# Altium PCB f429ig.pcbdoc (part 1 of 3)
Units mil, origin at the board's own origin, x right, y up, seen from the top; angles counter-clockwise.
Board outline 8198.65 x 7801.59 mil, 2 copper layers (Top Layer, Bottom Layer); 96 components, 183 nets, 663 pads, 462 vias.
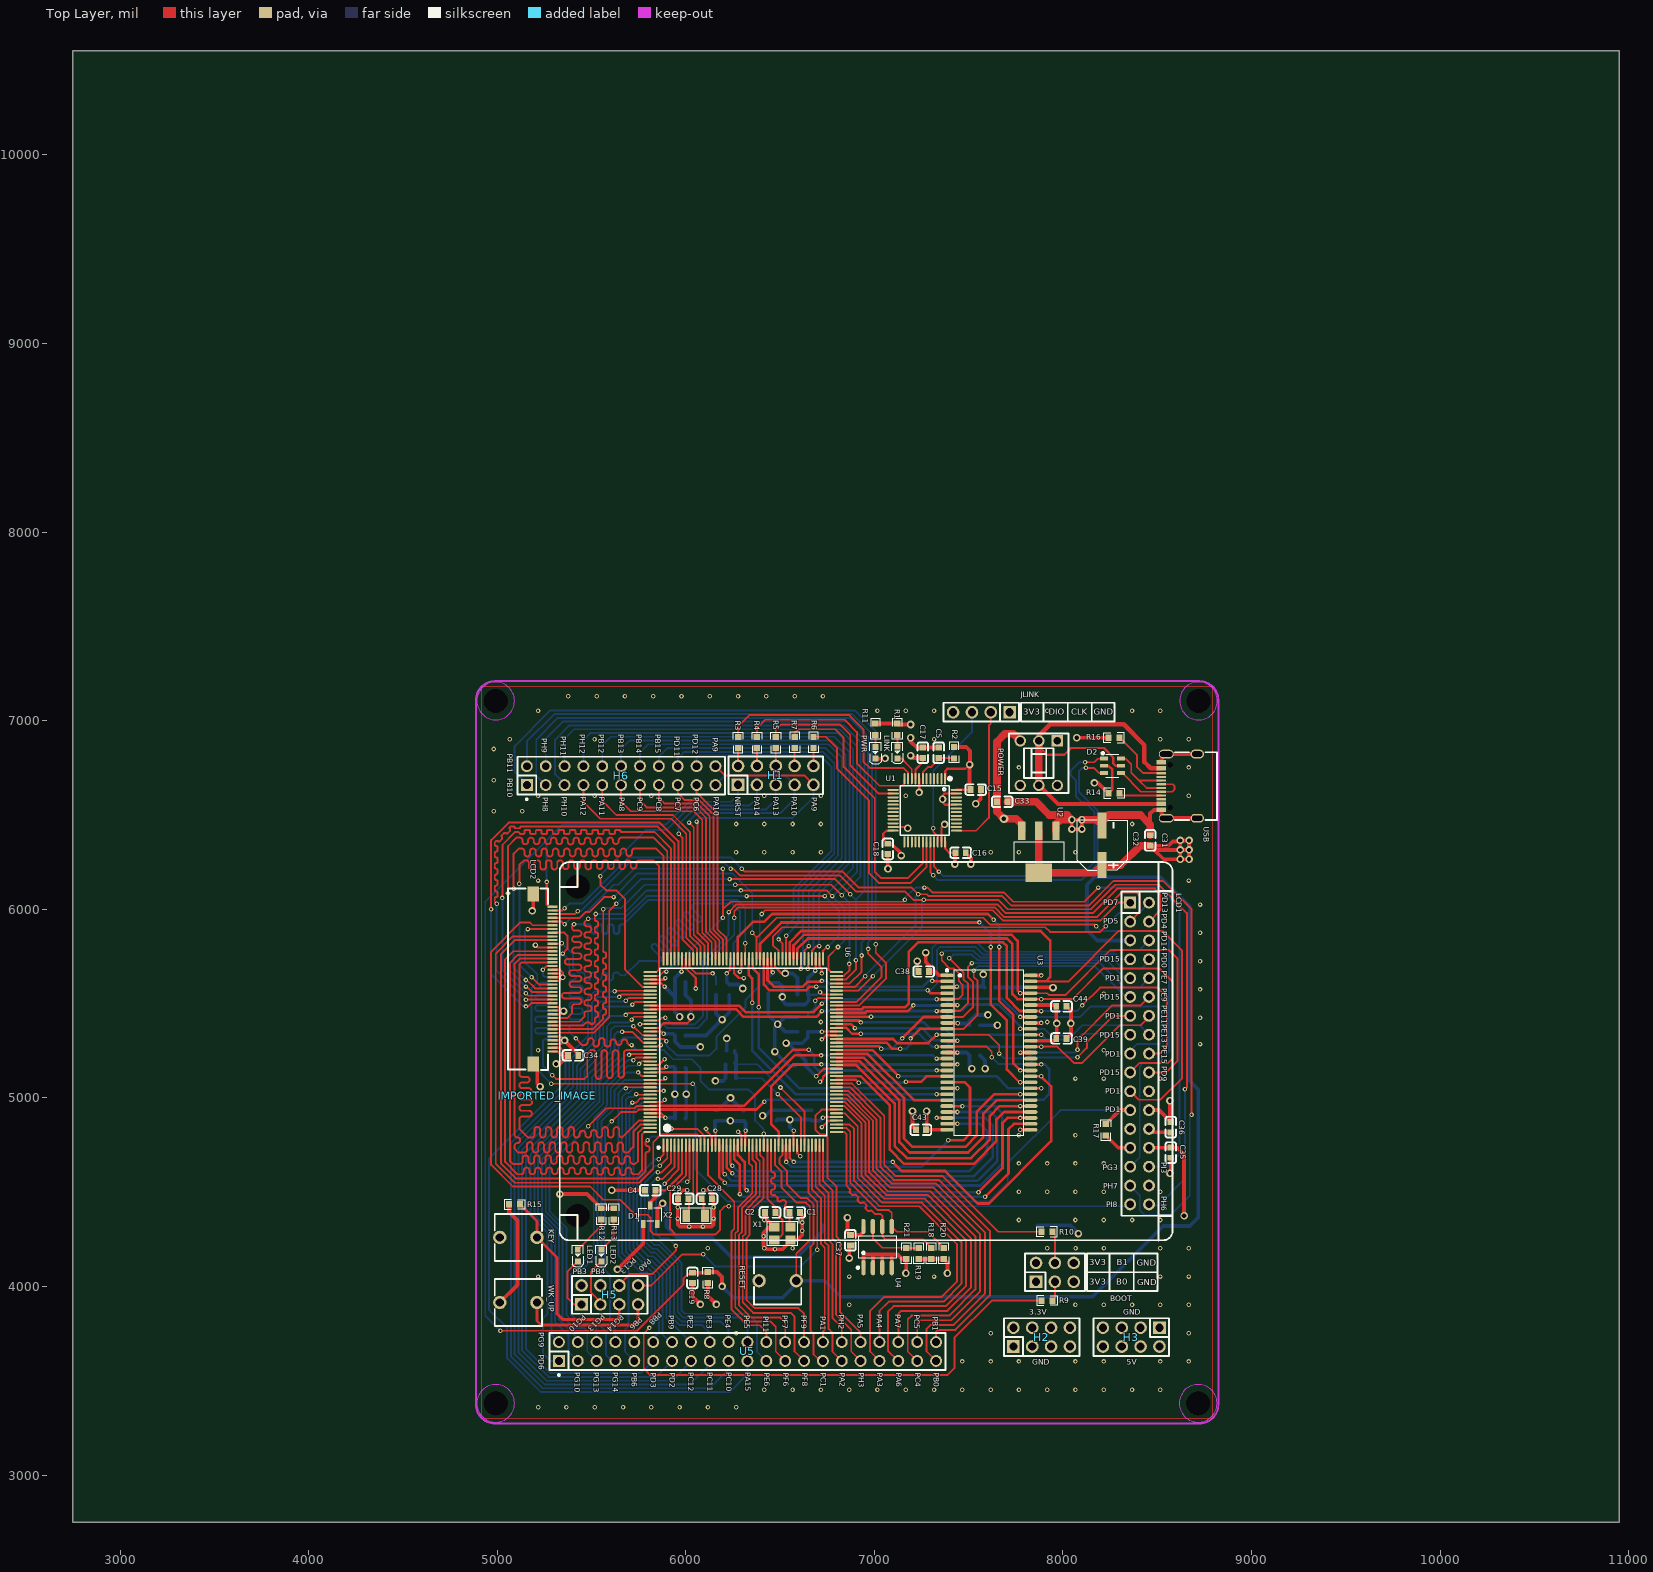
[diagram p0: Top Layer view]
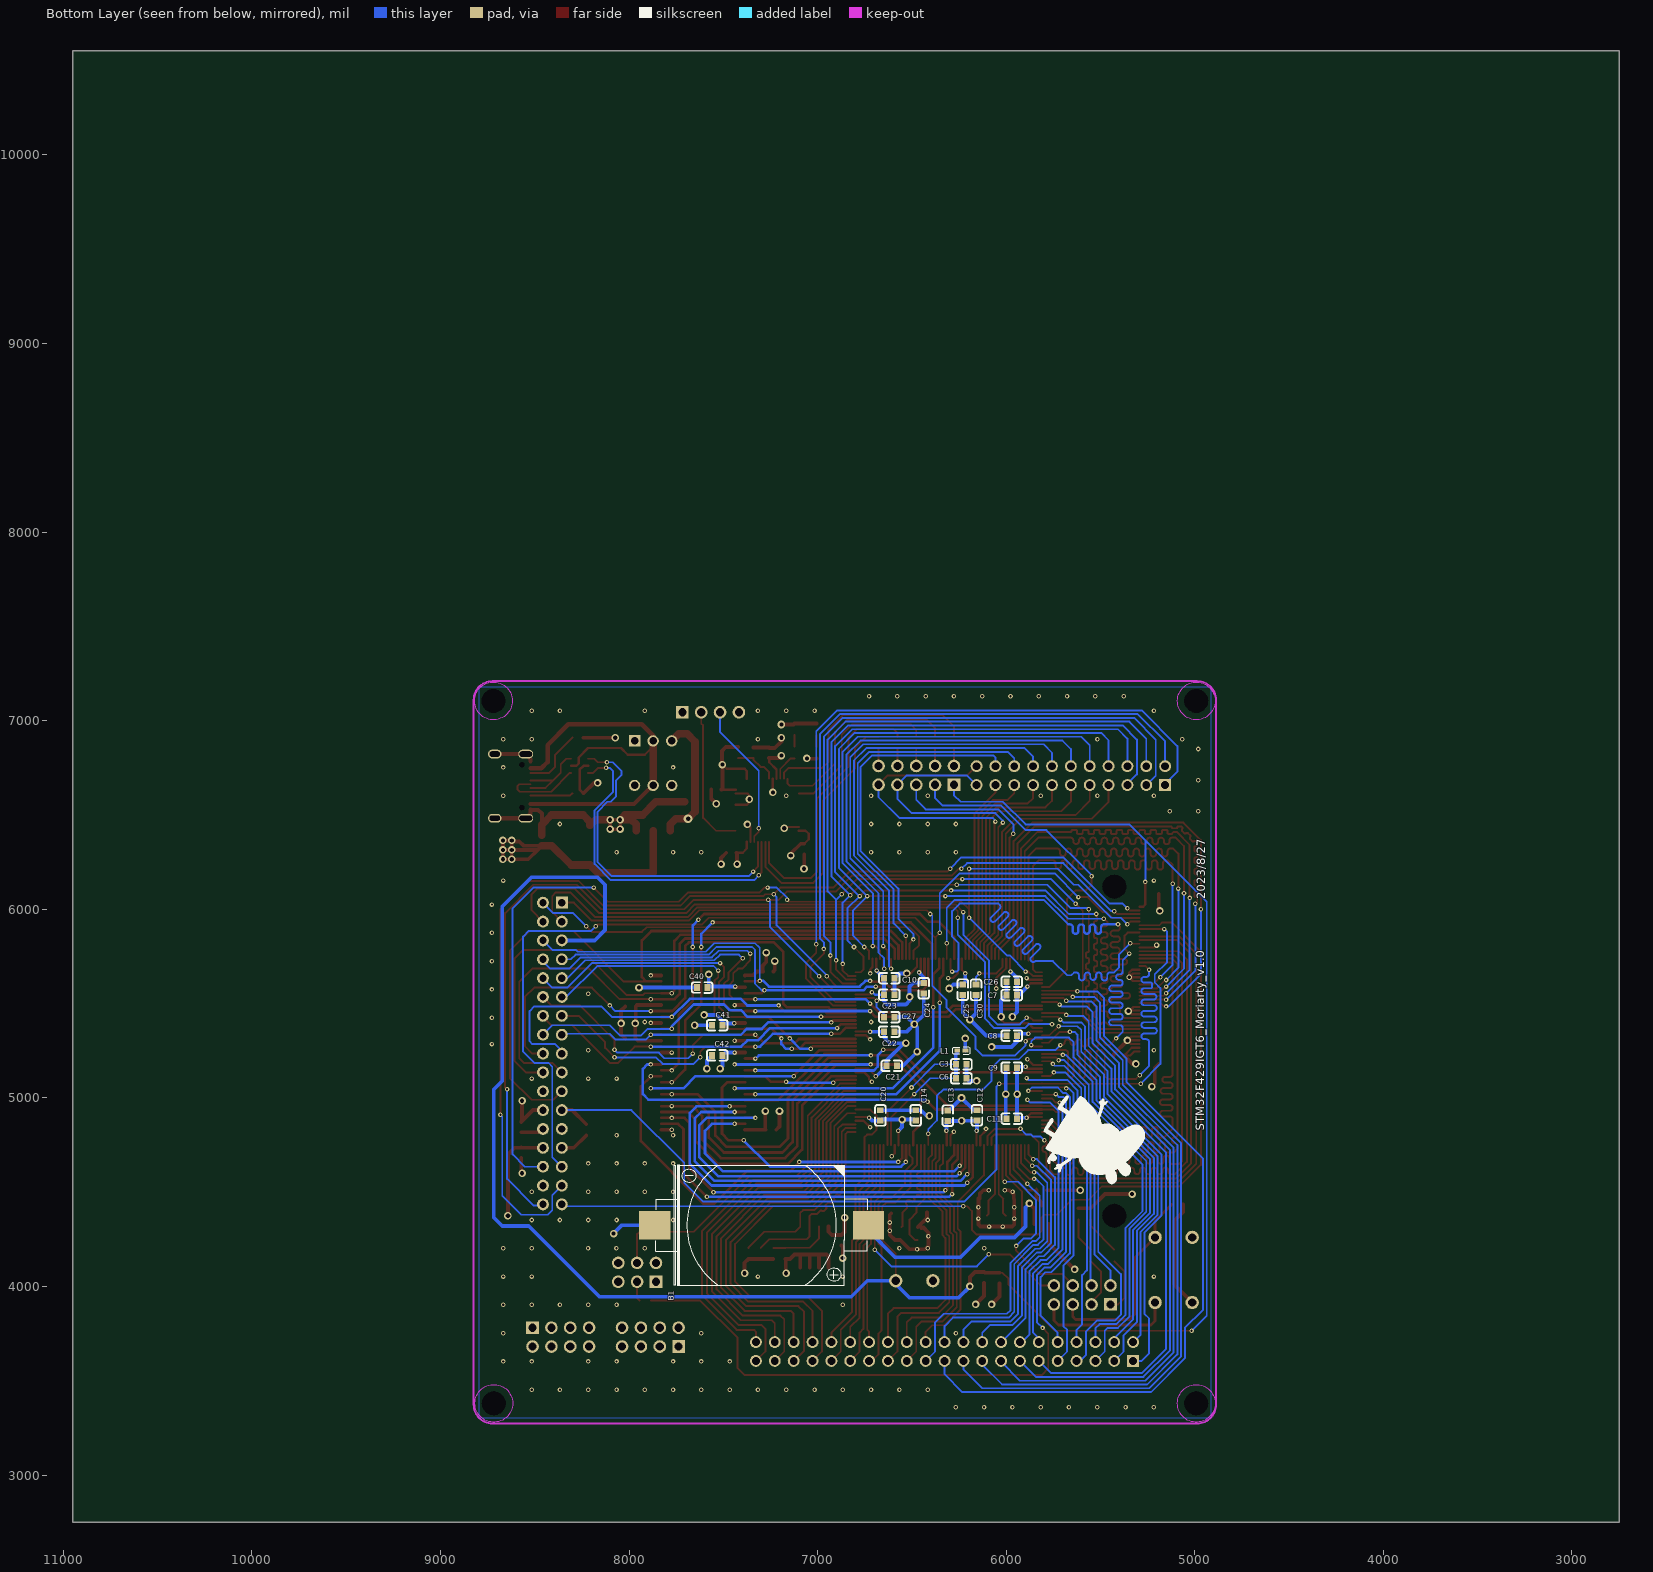
[diagram p1: Bottom Layer view, seen from below]

## Layer stack, top to bottom
Top Layer: signal copper (thickness not stored)
Dielectric: dielectric 12.6, FR-4, Dk 4.8
Bottom Layer: signal copper (thickness not stored)

## Board outline
10948.65,2750 2750,2750 2750,10551.59 10948.65,10551.59
cut-out: 8782.11,7105.13 ccw(c8719.11,7105.13) 8656.12,7105.13 ccw(c8719.11,7105.13)
cut-out: 5489.15,6120 ccw(c5426.16,6120) 5363.17,6120 ccw(c5426.16,6120)
cut-out: 5489.15,4374.84 ccw(c5426.16,4374.84) 5363.17,4374.84 ccw(c5426.16,4374.84)
cut-out: 5055.1,7105.01 ccw(c4992.11,7105.01) 4929.12,7105.01 ccw(c4992.11,7105.01)
cut-out: 5055.1,3380.13 ccw(c4992.11,3380.13) 4929.11,3380.13 ccw(c4992.11,3380.13)
cut-out: 8780.1,3380.13 ccw(c8717.11,3380.13) 8654.11,3380.13 ccw(c8717.11,3380.13)

## Components (designator, comment, footprint, x,y, rotation, side; value= is the part's Value field where it differs from the comment)
B1 "CR2032-BS-6-1" BAT-TH_CR2032-BS-6-1 7296.94,4325 r180 bottom
BOOT "PZ254V-12-6P" HDR-TH_6P-P2.54-V-M-R2-C3-S2.54 7956.93,4075 r0 top
C1 "0603CG220J500NT" C0603 6576.93,4392.51 r180 top
C2 "0603CG220J500NT" C0603 6446.93,4392.3 r0 top
C3 "CAP_0603" C0603 6237.94,5178.21 r0 bottom
C4 "CC0603KRX7R9BB104" C0603 5811.93,4510 r0 top
C5 "CC0603KRX7R9BB104" C0603 7340.6,6830 r270 top
C6 "CAP_0603" C0603 6237.94,5103.76 r0 bottom
C7 "CC0603KRX7R9BB104" C0603 5969.97,5545 r180 bottom
C8 "CC0603KRX7R9BB104" c0603 5969.97,5330 r180 bottom
C9 "CC0603KRX7R9BB104" C0603 5969.97,5160 r180 bottom
C10 "CC0603KRX7R9BB104" C0603 6619.97,5635 r0 bottom
C11 "CC0603KRX7R9BB104" C0603 5969.97,4890 r180 bottom
C12 "CC0603KRX7R9BB104" C0603 6154.97,4906.75 r270 bottom
C13 "CC0603KRX7R9BB104" C0603 6309.23,4905.57 r270 bottom
C14 "CC0603KRX7R9BB104" C0603 6479.97,4906.75 r270 bottom
C15 "CC0603KRX7R9BB104" C0603 7536.93,6635 r180 top
C16 "CC0603KRX7R9BB104" C0603 7456.93,6300 r180 top
C17 "CC0603KRX7R9BB104" C0603 7256.93,6830 r270 top
C18 "CC0603KRX7R9BB104" C0603 7071.15,6320 r90 top
C19 "CC0603KRX7R9BB104" C0603 6035.2,4045 r90 top
C20 "CC0603KRX7R9BB104" C0603 6666.93,4906.75 r270 bottom
C21 "CC0603KRX7R9BB104" C0603 6606.93,5169.88 r0 bottom
C22 "CC0603KRX7R9BB104" C0603 6619.97,5351.1 r0 bottom
C23 "CC0603KRX7R9BB104" C0603 6619.97,5547.01 r0 bottom
C24 "CC0603KRX7R9BB104" C0603 6436.93,5581.59 r90 bottom
C25 "CC0603KRX7R9BB104" C0603 6229.97,5574.17 r90 bottom
C26 "CC0603KRX7R9BB104" C0603 5969.97,5615 r180 bottom
C27 "CL10A225KQ8NNNC" C0603 6619.97,5428.15 r0 bottom
C28 "CC0603JRNPO9BN100" C0603 6111.93,4465 r180 top
C29 "CC0603JRNPO9BN100" C0603 5986.93,4464.79 r0 top
C30 "CL10A225KQ8NNNC" C0603 6159.75,5573.15 r90 bottom
C31 "CC0603KRX7R9BB104" C0603 8461.93,6365 r270 top
C32 "RVT1A221M0605_C72494" CAP-SMD_BD6.3-L6.6-W6.6-FD 8206.93,6340 r90 top
C33 "CC0603KRX7R9BB104" C0603 7677.64,6570 r180 top
C34 "CC0603KRX7R9BB104" C0603 5401.93,5224.92 r0 top
C35 "CC0603KRX7R9BB104" C0603 8571.93,4710 r90 top
C36 "CC0603KRX7R9BB104" C0603 8571.93,4845 r90 top
C37 "CC0603KRX7R9BB104" C0603 6872.77,4245 r90 top
C38 "CC0603KRX7R9BB104" C0603 7261.93,5670 r0 top
C39 "CC0603KRX7R9BB104" C0603 7991.93,5315 r180 top
C40 "CC0603KRX7R9BB104" C0603 7611.93,5585 r180 bottom
C41 "CC0603KRX7R9BB104" C0603 7531.93,5385 r180 bottom
C42 "CC0603KRX7R9BB104" C0603 7531.93,5225 r180 bottom
C43 "CC0603KRX7R9BB104" C0603 7246.93,4830.55 r0 top
C44 "CC0603KRX7R9BB104" C0603 7991.93,5485 r180 top
D1 "BAT54C_C2135" SOT-23-3_L2.9-W1.6-P1.90-LS2.8-BR 5811.63,4380 r270 top
D2 "USBLC6-2SC6_C2827654" SOT-23-6_L2.9-W1.6-P0.95-LS2.8-BL 8261.93,6761.03 r270 top
H1 "PZ254V-12-10P" HDR-TH_10P-P2.54-V-M-R2-C5-S2.54 6476.93,6710 r0 top
H2 "PZ254V-12-8P" HDR-TH_8P-P2.54-V-M-R2-C4-S2.54 7886.93,3731.28 r0 top
H3 "PZ254V-12-8P" HDR-TH_8P-P2.54-V-M-R2-C4-S2.54 8361.62,3731.28 r180 top
H5 "PZ254V-12-8P" HDR-TH_8P-P2.54-V-M-R2-C4-S2.54 5596.93,3955 r0 top
H6 "X6521WV-2x11H-C60D30" HDR-TH_22P-2.54-V-M-R2-C11-S2.54 5656.93,6709 r0 top
IMPORTED_IMAGE "IMPORTED_IMAGE" IMPORTED_IMAGE 5264.33,5010.71 r0 top
JLINK "PZ254V-11-04P" HDR-TH_4P-P2.54-V-M 7567.21,7045 r180 top
KEY "CMI626001D10" SW-TH_2P-L6.2-W6.2-P5.0 5111.93,4260 r180 top
L1 "GZ1005D121TF" L0402 6237.63,5250 r180 bottom
LCD1 "={Manufacturer Part}" HDR-TH_34P-P2.54-V-F-R2-C17-S2.54 8406.16,5235 r270 top
LCD2 "={Manufacturer Part}" FPC-SMD_P0.50-40P_FGS-XJ-H2.0 5241.93,5630 r90 top
LED1 "NCD0603W1" LED0603-RD 5426.93,4164.29 r90 top
LED2 "NCD0603W1" LED0603-RD 5551.93,4164.29 r90 top
LINK "NCD0603W1" LED0603-RD 7121.93,6831.87 r90 top
POWER "XKB8080-Z" SW-TH_6P-L8.0-W8.0-P2.50 7871.93,6775 r180 top
PWR "NCD0603W1" LED0603-RD 7005.67,6830.14 r90 top
R1 "0603WAF1001T5E" R0603 7121.72,6955 r90 top
R2 "0603WAF1002T5E" R0603 7421.93,6830.31 r90 top
R3 "0603WAF1000T5E" R0603 6276.93,6885 r270 top
R4 "0603WAF1000T5E" R0603 6376.93,6885 r270 top
R5 "0603WAF1000T5E" R0603 6476.93,6885 r270 top
R6 "0603WAF1000T5E" R0603 6676.93,6885 r90 top
R7 "0603WAF1000T5E" R0603 6576.93,6885 r90 top
R8 "0603WAF1002T5E" R0603 6116.93,4047.19 r270 top
R9 "0603WAF1002T5E" R0603 7914.56,3925 r180 top
R10 "0603WAF1002T5E" R0603 7914.56,4290 r0 top
R11 "0603WAF1001T5E" R0603 7005.45,6955 r90 top
R12 "0603WAF4700T5E" R0603 5551.93,4385 r270 top
R13 "0603WAF4700T5E" R0603 5616.93,4385 r270 top
R14 "0603WAF4701T5E" R0603 8270.74,6615 r180 top
R15 "0603WAF4701T5E" R0603 5091.93,4435 r180 top
R16 "0603WAF4701T5E" R0603 8270.74,6910 r0 top
R17 "0603WAF4701T5E" R0603 8226.93,4830.66 r270 top
R18 "0603WAF4701T5E" R0603 7301.1,4175 r90 top
R19 "0603WAF4701T5E" R0603 7235.27,4175 r90 top
R20 "0603WAF4701T5E" R0603 7366.93,4175 r90 top
R21 "0603WAF1000T5E" R0603 7169.44,4175 r90 top
RESET "CMI626001D10" SW-TH_2P-L6.2-W6.2-P5.0 6486.93,4030 r180 top
U1 "STM32F072C8T6" LQFP-48_L7.0-W7.0-P0.50-LS9.0-BL 7266.93,6525 r180 top
U2 "AMS1117-3.3_C347222" SOT-223-4_L6.5-W3.5-P2.30-LS7.0-BR 7871.93,6305 r90 top
U3 "W9825G6KH-6" TSOP-54_L22.2-W10.2-P0.80-LS11.8-BL 7606.93,5240 r270 top
U4 "AT24C256C-SSHL-T" SOIC-8_L4.9-W3.9-P1.27-LS6.0-BL 7016.93,4208.58 r0 top
U5 "X6521WV-2x21H-C60D30" HDR-TH_42P-P2.54-V-M-R2-C21-S2.54 6326.93,3655 r0 top
U6 "STM32F429IGT6" LQFP-176_L24.0-W24.0-P0.50-LS26.0-BL 6304.97,5243.15 r0 top
USB "KH-TYPE-C-16P" USB-C-SMD_KH-TYPE-C-16P 8616.93,6652.98 r90 top
WK_UP "CMI626001D10" SW-TH_2P-L6.2-W6.2-P5.0 5111.93,3915 r0 top
X1 "X322525MOB4SI" OSC-SMD_4P-L3.2-W2.5-BL 6511.93,4280 r180 top
X2 "Q13FC1350004900" CRYSTAL-SMD_L3.2-W1.5-1 6051.93,4375 r180 top

## Footprints (in the part's own frame and the unit in brackets; to place one, negate y for a bottom-side part, rotate by r counter-clockwise, add the part's x,y. Pads: shape width x height; smd on the part's side, far side on the other; paste and mask are expansions set on the pad)
BAT-TH_CR2032-BS-6-1 [mm]
  rect 4.2x3.8 smd mask+0.051: 1(14.385,0) 2(-14.385,0)
  silkscreen extent -14.25,-8.15 14.25,8.15
C0603 [mm]
  rect 0.8x0.9 smd mask+0.051: 1(-0.7,0) 2(0.7,0)
  silkscreen extent -1.41,-0.71 1.39,0.72
c0603 [mm]
  rect 0.8x0.9 smd mask+0.051: 1(-0.7,0) 2(0.7,0)
  silkscreen extent -1.41,-0.71 1.39,0.72
CAP-SMD_BD6.3-L6.6-W6.6-FD [mm]
  rect 3.5x1.2 smd mask+0.051: 1(-2.67,0) 2(2.67,0)
  silkscreen extent -3.38,-3.38 3.38,3.38
CRYSTAL-SMD_L3.2-W1.5-1 [mm]
  rect 1.05x1.7 smd mask+0.051: 1(-1.275,0) 2(1.275,0)
  silkscreen extent -2.03,-1.08 2.03,1.08
FPC-SMD_P0.50-40P_FGS-XJ-H2.0 [mm]
  rect 0.3x1.3 smd paste+0 mask+0.05: 1(-9.75,-1.3) 2(-9.25,-1.3) 3(-8.75,-1.3) 4(-8.25,-1.3) 5(-7.75,-1.3) 6(-7.25,-1.3) 7(-6.75,-1.3) 8(-6.25,-1.3) 9(-5.75,-1.3) 10(-5.25,-1.3) 11(-4.75,-1.3) 12(-4.25,-1.3) 13(-3.75,-1.3) 14(-3.25,-1.3) 15(-2.75,-1.3) 16(-2.25,-1.3) 17(-1.75,-1.3) 18(-1.25,-1.3) 19(-0.75,-1.3) 20(-0.25,-1.3) 21(0.25,-1.3) 22(0.75,-1.3) 23(1.25,-1.3) 24(1.75,-1.3) 25(2.25,-1.3) 26(2.75,-1.3) 27(3.25,-1.3) 28(3.75,-1.3) 29(4.25,-1.3) 30(4.75,-1.3) 31(5.25,-1.3) 32(5.75,-1.3) 33(6.25,-1.3) 34(6.75,-1.3) 35(7.25,-1.3) 36(7.75,-1.3) 37(8.25,-1.3) 38(8.75,-1.3) 39(9.25,-1.3) 40(9.75,-1.3)
  rect 2x1.6 smd mask+0.051: 41(11.45,1.3) 42(-11.45,1.3)
  silkscreen extent -12.25,-0.7 12.2,4.7
HDR-TH_4P-P2.54-V-M [mm]
  rect 1.7x1.7 hole 1.1 mask+0.051: 1(-3.81,0)
  round 1.7 hole 1.1 mask+0.051: 2(-1.27,0) 3(1.27,0) 4(3.81,0)
  silkscreen extent -5.08,-1.27 5.08,1.27
HDR-TH_6P-P2.54-V-M-R2-C3-S2.54 [mm]
  rect 1.7x1.7 hole 1.1 mask+0.051: 1(-2.54,-1.27)
  round 1.7 hole 1.1 mask+0.051: 2(-2.54,1.27) 3(0,-1.27) 4(0,1.27) 5(2.54,-1.27) 6(2.54,1.27)
  silkscreen extent -4.04,-2.54 4.04,2.54
HDR-TH_8P-P2.54-V-M-R2-C4-S2.54 [mm]
  rect 1.7x1.7 hole 1.1 mask+0.051: 1(-3.81,-1.27)
  round 1.7 hole 1.1 mask+0.051: 2(-3.81,1.27) 3(-1.27,-1.27) 4(-1.27,1.27) 5(1.27,-1.27) 6(1.27,1.27) 7(3.81,-1.27) 8(3.81,1.27)
  silkscreen extent -5.08,-2.54 5.08,2.54
HDR-TH_10P-P2.54-V-M-R2-C5-S2.54 [mm]
  rect 1.7x1.7 hole 1.1 mask+0.051: 1(-5.08,-1.27)
  round 1.7 hole 1.1 mask+0.051: 2(-5.08,1.27) 3(-2.54,-1.27) 4(-2.54,1.27) 5(0,-1.27) 6(0,1.27) 7(2.54,-1.27) 8(2.54,1.27) 9(5.08,-1.27) 10(5.08,1.27)
  silkscreen extent -6.35,-2.54 6.35,2.54
HDR-TH_22P-2.54-V-M-R2-C11-S2.54 [mm]
  rect 1.6x1.6 hole 1.05 mask+0.051: 1(-12.7,-1.27)
  round 1.6 hole 1.05 mask+0.051: 2(-12.7,1.27) 3(-10.16,-1.27) 4(-10.16,1.27) 5(-7.62,-1.27) 6(-7.62,1.27) 7(-5.08,-1.27) 8(-5.08,1.27) 9(-2.54,-1.27) 10(-2.54,1.27) 11(0,-1.27) 12(0,1.27) 13(2.54,-1.27) 14(2.54,1.27) 15(5.08,-1.27) 16(5.08,1.27) 17(7.62,-1.27) 18(7.62,1.27) 19(10.16,-1.27) 20(10.16,1.27) 21(12.7,-1.27) 22(12.7,1.27)
  silkscreen extent -13.97,-3.3 13.97,2.54
HDR-TH_34P-P2.54-V-F-R2-C17-S2.54 [mm]
  rect 1.6x1.6 hole 1 mask+0.051: 1(-20.32,-1.27)
  round 1.6 hole 1 mask+0.051: 2(-20.32,1.27) 3(-17.78,-1.27) 4(-17.78,1.27) 5(-15.24,-1.27) 6(-15.24,1.27) 7(-12.7,-1.27) 8(-12.7,1.27) 9(-10.16,-1.27) 10(-10.16,1.27) 11(-7.62,-1.27) 12(-7.62,1.27) 13(-5.08,-1.27) 14(-5.08,1.27) 15(-2.54,-1.27) 16(-2.54,1.27) 17(0,-1.27) 18(0,1.27) 19(2.54,-1.27) 20(2.54,1.27) 21(5.08,-1.27) 22(5.08,1.27) 23(7.62,-1.27) 24(7.62,1.27) 25(10.16,-1.27) 26(10.16,1.27) 27(12.7,-1.27) 28(12.7,1.27) 29(15.24,-1.27) 30(15.24,1.27) 31(17.78,-1.27) 32(17.78,1.27) 33(20.32,-1.27) 34(20.32,1.27)
  silkscreen extent -21.84,-2.41 21.84,2.54
HDR-TH_42P-P2.54-V-M-R2-C21-S2.54 [mm]
  rect 1.6x1.6 hole 1.05 mask+0.051: 1(-25.4,-1.27)
  round 1.6 hole 1.05 mask+0.051: 2(-25.4,1.27) 3(-22.86,-1.27) 4(-22.86,1.27) 5(-20.32,-1.27) 6(-20.32,1.27) 7(-17.78,-1.27) 8(-17.78,1.27) 9(-15.24,-1.27) 10(-15.24,1.27) 11(-12.7,-1.27) 12(-12.7,1.27) 13(-10.16,-1.27) 14(-10.16,1.27) 15(-7.62,-1.27) 16(-7.62,1.27) 17(-5.08,-1.27) 18(-5.08,1.27) 19(-2.54,-1.27) 20(-2.54,1.27) 21(0,-1.27) 22(0,1.27) 23(2.54,-1.27) 24(2.54,1.27) 25(5.08,-1.27) 26(5.08,1.27) 27(7.62,-1.27) 28(7.62,1.27) 29(10.16,-1.27) 30(10.16,1.27) 31(12.7,-1.27) 32(12.7,1.27) 33(15.24,-1.27) 34(15.24,1.27) 35(17.78,-1.27) 36(17.78,1.27) 37(20.32,-1.27) 38(20.32,1.27) 39(22.86,-1.27) 40(22.86,1.27) 41(25.4,-1.27) 42(25.4,1.27)
  silkscreen extent -26.67,-3.3 26.67,2.5
IMPORTED_IMAGE [mil]
L0402 [mm]
  rect 0.79x0.54 smd paste-100 mask+0.051: 1(-0.545,0) 2(0.545,0)
  silkscreen extent -1.17,-0.5 1.17,0.5
LED0603-RD [mm]
  rect 0.8x0.8 smd mask+0.051: 1(-0.799,-0.003) 2(0.799,0.003)
  silkscreen extent -1.49,-0.75 1.39,0.76
LQFP-48_L7.0-W7.0-P0.50-LS9.0-BL [mm]
  oval 0.27x1.5 smd paste+0 mask+0.05: 1(-2.75,-4.25) 2(-2.25,-4.25) 3(-1.75,-4.25) 4(-1.25,-4.25) 5(-0.75,-4.25) 6(-0.25,-4.25) 7(0.25,-4.25) 8(0.75,-4.25) 9(1.25,-4.25) 10(1.75,-4.25) 11(2.25,-4.25) 12(2.75,-4.25) 25(2.75,4.25) 26(2.25,4.25) 27(1.75,4.25) 28(1.25,4.25) 29(0.75,4.25) 30(0.25,4.25) 31(-0.25,4.25) 32(-0.75,4.25) 33(-1.25,4.25) 34(-1.75,4.25) 35(-2.25,4.25) 36(-2.75,4.25)
  oval 1.5x0.27 smd paste+0 mask+0.05: 13(4.25,-2.75) 14(4.25,-2.25) 15(4.25,-1.75) 16(4.25,-1.25) 17(4.25,-0.75) 18(4.25,-0.25) 19(4.25,0.25) 20(4.25,0.75) 21(4.25,1.25) 22(4.25,1.75) 23(4.25,2.25) 24(4.25,2.75) 37(-4.25,2.75) 38(-4.25,2.25) 39(-4.25,1.75) 40(-4.25,1.25) 41(-4.25,0.75) 42(-4.25,0.25) 43(-4.25,-0.25) 44(-4.25,-0.75) 45(-4.25,-1.25) 46(-4.25,-1.75) 47(-4.25,-2.25) 48(-4.25,-2.75)
  silkscreen extent -3.59,-4.46 3.3,3.34
LQFP-176_L24.0-W24.0-P0.50-LS26.0-BL [mm]
  oval 0.28x1.8 smd mask+0.051: 1(-10.75,-12.55) 2(-10.25,-12.55) 3(-9.75,-12.55) 4(-9.25,-12.55) 5(-8.75,-12.55) 6(-8.25,-12.55) 7(-7.75,-12.55) 8(-7.25,-12.55) 9(-6.75,-12.55) 10(-6.25,-12.55) 11(-5.75,-12.55) 12(-5.25,-12.55) 13(-4.75,-12.55) 14(-4.25,-12.55) 15(-3.75,-12.55) 16(-3.25,-12.55) 17(-2.75,-12.55) 18(-2.25,-12.55) 19(-1.75,-12.55) 20(-1.25,-12.55) 21(-0.75,-12.55) 22(-0.25,-12.55) 23(0.25,-12.55) 24(0.75,-12.55) 25(1.25,-12.55) 26(1.75,-12.55) 27(2.25,-12.55) 28(2.75,-12.55) 29(3.25,-12.55) 30(3.75,-12.55) 31(4.25,-12.55) 32(4.75,-12.55) 33(5.25,-12.55) 34(5.75,-12.55) 35(6.25,-12.55) 36(6.75,-12.55) 37(7.25,-12.55) 38(7.75,-12.55) 39(8.25,-12.55) 40(8.75,-12.55) 41(9.25,-12.55) 42(9.75,-12.55) 43(10.25,-12.55) 44(10.75,-12.55) 89(10.75,12.55) 90(10.25,12.55) 91(9.75,12.55) 92(9.25,12.55) 93(8.75,12.55) 94(8.25,12.55) 95(7.75,12.55) 96(7.25,12.55) 97(6.75,12.55) 98(6.25,12.55) 99(5.75,12.55) 100(5.25,12.55) 101(4.75,12.55) 102(4.25,12.55) 103(3.75,12.55) 104(3.25,12.55) 105(2.75,12.55) 106(2.25,12.55) 107(1.75,12.55) 108(1.25,12.55) 109(0.75,12.55) 110(0.25,12.55) 111(-0.25,12.55) 112(-0.75,12.55) 113(-1.25,12.55) 114(-1.75,12.55) 115(-2.25,12.55) 116(-2.75,12.55) 117(-3.25,12.55) 118(-3.75,12.55) 119(-4.25,12.55) 120(-4.75,12.55) 121(-5.25,12.55) 122(-5.75,12.55) 123(-6.25,12.55) 124(-6.75,12.55) 125(-7.25,12.55) 126(-7.75,12.55) 127(-8.25,12.55) 128(-8.75,12.55) 129(-9.25,12.55) 130(-9.75,12.55) 131(-10.25,12.55) 132(-10.75,12.55)
  oval 1.8x0.28 smd mask+0.051: 45(12.55,-10.75) 46(12.55,-10.25) 47(12.55,-9.75) 48(12.55,-9.25) 49(12.55,-8.75) 50(12.55,-8.25) 51(12.55,-7.75) 52(12.55,-7.25) 53(12.55,-6.75) 54(12.55,-6.25) 55(12.55,-5.75) 56(12.55,-5.25) 57(12.55,-4.75) 58(12.55,-4.25) 59(12.55,-3.75) 60(12.55,-3.25) 61(12.55,-2.75) 62(12.55,-2.25) 63(12.55,-1.75) 64(12.55,-1.25) 65(12.55,-0.75) 66(12.55,-0.25) 67(12.55,0.25) 68(12.55,0.75) 69(12.55,1.25) 70(12.55,1.75) 71(12.55,2.25) 72(12.55,2.75) 73(12.55,3.25) 74(12.55,3.75) 75(12.55,4.25) 76(12.55,4.75) 77(12.55,5.25) 78(12.55,5.75) 79(12.55,6.25) 80(12.55,6.75) 81(12.55,7.25) 82(12.55,7.75) 83(12.55,8.25) 84(12.55,8.75) 85(12.55,9.25) 86(12.55,9.75) 87(12.55,10.25) 88(12.55,10.75) 133(-12.55,10.75) 134(-12.55,10.25) 135(-12.55,9.75) 136(-12.55,9.25) 137(-12.55,8.75) 138(-12.55,8.25) 139(-12.55,7.75) 140(-12.55,7.25) 141(-12.55,6.75) 142(-12.55,6.25) 143(-12.55,5.75) 144(-12.55,5.25) 145(-12.55,4.75) 146(-12.55,4.25) 147(-12.55,3.75) 148(-12.55,3.25) 149(-12.55,2.75) 150(-12.55,2.25) 151(-12.55,1.75) 152(-12.55,1.25) 153(-12.55,0.75) 154(-12.55,0.25) 155(-12.55,-0.25) 156(-12.55,-0.75) 157(-12.55,-1.25) 158(-12.55,-1.75) 159(-12.55,-2.25) 160(-12.55,-2.75) 161(-12.55,-3.25) 162(-12.55,-3.75) 163(-12.55,-4.25) 164(-12.55,-4.75) 165(-12.55,-5.25) 166(-12.55,-5.75) 167(-12.55,-6.25) 168(-12.55,-6.75) 169(-12.55,-7.25) 170(-12.55,-7.75) 171(-12.55,-8.25) 172(-12.55,-8.75) 173(-12.55,-9.25) 174(-12.55,-9.75) 175(-12.55,-10.25) 176(-12.55,-10.75)
  silkscreen extent -11.57,-13.03 11.25,11.25
OSC-SMD_4P-L3.2-W2.5-BL [mm]
  rect 1.4x1.2 smd mask+0.051: 1(-1.1,-0.875) 2(1.1,-0.875) 3(1.1,0.875) 4(-1.1,0.875)
  silkscreen extent -2.29,-1.9 2.03,1.65
R0603 [mil]
  rect 31.75x34.02 smd paste-3937.01 mask+2: 1(-29.66,0) 2(29.66,0)
  silkscreen extent -55,-26 55,26
SOIC-8_L4.9-W3.9-P1.27-LS6.0-BL [mm]
  oval 0.588x2.045 smd mask+0.051: 1(-1.905,-2.772) 2(-0.635,-2.772) 3(0.635,-2.772) 4(1.905,-2.772) 5(1.905,2.772) 6(0.635,2.772) 7(-0.635,2.772) 8(-1.905,2.772)
  silkscreen extent -2.8,-2.92 2.53,1.52
SOT-23-3_L2.9-W1.6-P1.90-LS2.8-BR [mm]
  rect 1.07x0.6 smd mask+0.051: 1(1.235,-0.95) 2(1.235,0.95) 3(-1.235,0)
  silkscreen extent -0.88,-1.54 0.88,1.54
SOT-23-6_L2.9-W1.6-P0.95-LS2.8-BL [mil]
  rect 20.95x42.2 smd mask+2: 1(-37.4,-45.24) 2(0,-45.24) 3(37.4,-45.24) 4(37.4,45.24) 5(0,45.24) 6(-37.4,45.24)
  silkscreen extent -72,-57 61,35
SOT-223-4_L6.5-W3.5-P2.30-LS7.0-BR [mm]
  rect 2.47x0.98 smd mask+0.051: 1(2.835,-2.3) 2(2.835,0) 3(2.835,2.3)
  rect 2.47x3.6 smd mask+0.051: 4(-2.835,0)
  silkscreen extent -1.37,-3.33 1.37,3.33
SW-TH_2P-L6.2-W6.2-P5.0 [mm]
  round 1.8 hole 1.1 paste+0 mask+0.05: 1(-2.5,0) 2(2.5,0)
  silkscreen extent -3.18,-3.18 3.17,3.18
SW-TH_6P-L8.0-W8.0-P2.50 [mm]
  rect 1.524x1.524 hole 1 mask+0.051: 1(-2.5,-3)
  round 1.524 hole 1 mask+0.051: 2(0,-3) 3(2.5,-3) 4(-2.5,3) 5(0,3) 6(2.5,3)
  silkscreen extent -4,-4 4,4
TSOP-54_L22.2-W10.2-P0.80-LS11.8-BL [mm]
  oval 0.5x1.8 smd mask+0.051: 1(-10.4,-5.642) 2(-9.6,-5.642) 3(-8.8,-5.642) 4(-8,-5.642) 5(-7.2,-5.642) 6(-6.4,-5.642) 7(-5.6,-5.642) 8(-4.8,-5.642) 9(-4,-5.642) 10(-3.2,-5.642) 11(-2.4,-5.642) 12(-1.6,-5.642) 13(-0.8,-5.642) 14(0,-5.642) 15(0.8,-5.642) 16(1.6,-5.642) 17(2.4,-5.642) 18(3.2,-5.642) 19(4,-5.642) 20(4.8,-5.642) 21(5.6,-5.642) 22(6.4,-5.642) 23(7.2,-5.642) 24(8,-5.642) 25(8.8,-5.642) 26(9.6,-5.642) 27(10.4,-5.642) 28(10.4,5.642) 29(9.6,5.642) 30(8.8,5.642) 31(8,5.642) 32(7.2,5.642) 33(6.4,5.642) 34(5.6,5.642) 35(4.8,5.642) 36(4,5.642) 37(3.2,5.642) 38(2.4,5.642) 39(1.6,5.642) 40(0.8,5.642) 41(0,5.642) 42(-0.8,5.642) 43(-1.6,5.642) 44(-2.4,5.642) 45(-3.2,5.642) 46(-4,5.642) 47(-4.8,5.642) 48(-5.6,5.642) 49(-6.4,5.642) 50(-7.2,5.642) 51(-8,5.642) 52(-8.8,5.642) 53(-9.6,5.642) 54(-10.4,5.642)
  silkscreen extent -11.23,-5.79 11.19,4.65
USB-C-SMD_KH-TYPE-C-16P [mm]
  oval 1.2x2 hole 0.7 slot 1.7 at 90 deg mask+0.051: 1(-4.32,1.765) 2(4.32,1.765)
  oval 1.2x1.8 hole 0.7 slot 1.4 at 90 deg mask+0.051: 3(-4.32,-2.415) 4(4.32,-2.415)
  rect 0.3x1.3 smd paste-100 mask+0.05: A1(-3.35,2.415) A4(-2.55,2.415) A5(-1.25,2.415) A6(-0.25,2.415) A7(0.25,2.415) A8(1.25,2.415) A9(2.55,2.415) A12(3.35,2.415) B1(3.05,2.415) B4(2.25,2.415) B5(1.75,2.415) B6(0.75,2.415) B7(-0.75,2.415) B8(-1.75,2.415) B9(-2.25,2.415) B12(-3.05,2.415)
  Multi-Layer board cut-out: -2.89,0.885 -2.738,0.92 -2.616,1.017 -2.549,1.157 -2.549,1.313 -2.616,1.453 -2.738,1.55 -2.89,1.585 -2.89,1.585 -3.042,1.55 -3.164,1.453 -3.231,1.313 -3.231,1.157 -3.164,1.017 -3.042,0.92 -2.89,0.885
  Multi-Layer board cut-out: 2.89,0.885 3.042,0.92 3.164,1.017 3.231,1.157 3.231,1.313 3.164,1.453 3.042,1.55 2.89,1.585 2.89,1.585 2.738,1.55 2.616,1.453 2.549,1.313 2.549,1.157 2.616,1.017 2.738,0.92 2.89,0.885
  silkscreen extent -4.57,-5.08 4.57,0.57

## Via types
v1: diameter 24, hole 12, Top Layer to Bottom Layer, 383 vias
v2: diameter 40, hole 22, Top Layer to Bottom Layer, 75 vias
v3: diameter 40, hole 25, Top Layer to Bottom Layer, 1 vias
v4: diameter 28, hole 15, Top Layer to Bottom Layer, 1 vias
v5: diameter 30, hole 17, Top Layer to Bottom Layer, 1 vias
v6: diameter 46, hole 24, Top Layer to Bottom Layer, 1 vias

## Nets (pads, with @x,y where several pads share a name; then routed paths per layer and width w, separated by ;. In a path a pad name is that pad's centre, name@x,y a point inside that pad or via, vN(x,y) a via of type N, cw(c..) or ccw(c..) an arc to the next point about the centre after c; other vN are vias at no path point)
$1N5196: LINK.1 U1.10 | length 150.9
  Top Layer w10: LINK.1@7122.07,6800.4 7141.53,6800.4 7198.03,6743.9 U1.10@7198.03,6692.32
$1N5200: LINK.2 R1.1 | length 62
  Top Layer w10: R1.1@7121.72,6925.34 7121.72,6863.43 LINK.2@7121.8,6863.35
$1N5639: JLINK.3 U1.34 | length 782.2
  Top Layer w10: v1(7311.93,6430) 7311.93,6410 7335.83,6386.1 U1.34@7335.83,6357.68
  Bottom Layer w10: v1(7311.93,6430) 7311.93,6735 7516.93,6940 7516.93,7044.73 JLINK.3@7517.21,7045
$1N5642: JLINK.2 U1.37 | length 765.2
  Top Layer w10: U1.37@7434.25,6416.73 7538.66,6416.73 7606.93,6485 7606.93,6975 7616.93,6985 7616.93,7044.73 JLINK.2@7617.21,7045
$1N5998: C5.2 R2.1 U1.7 | length 236.6
  Top Layer w10: U1.7@7257.09,6692.32 7257.09,6726.85 7285.25,6755 7301.93,6755 7340.6,6793.67 C5.2@7340.6,6802.44 7420.14,6802.44 R2.1@7421.93,6800.65
$1N6009: R3.1 U1.11 | length 1240.2
  Top Layer w10: R3.1@6276.93,6914.66 6276.93,6970 6336.93,7030 6866.93,7030 6941.93,6955 6941.93,6783.6 6975.53,6750 7151.93,6750 7178.35,6723.58 U1.11@7178.35,6692.32
$1N6762: R16.2 USB.B5 | length 336.6
  Top Layer w10: R16.2@8300.4,6910 8391.93,6818.47 8391.93,6755 8425.05,6721.88 USB.B5@8521.85,6721.88
$1N6769: R14.1 USB.A5 | length 226.1
  Top Layer w10: R14.1@8300.4,6615 8311.63,6603.77 USB.A5@8521.85,6603.77
$1N9909: BOOT.4 R10.2 | length 170.3
  Top Layer w10: R10.2@7944.22,4290 7956.93,4277.29 BOOT.4@7956.93,4125
$1N9912: BOOT.3 R9.1 | length 105.3
  Top Layer w10: R9.1@7944.22,3925 7956.93,3937.71 BOOT.3@7956.93,4025
$1N10155: C27.2 U6.81 | length 220.9
  Top Layer w10: v1(6686.93,5515) 6700.51,5528.58 U6.81@6799.06,5528.58
  Bottom Layer w10: C27.2@6647.53,5428.15 6647.53,5442.29 6686.93,5481.7 v1(6686.93,5515)
$1N10158: C30.2 U6.125 | length 247.3
  Top Layer w10: U6.125@6019.54,5737.24 6019.54,5692.4 6051.93,5660 v1(6141.93,5660)
  Bottom Layer w10: v1(6141.93,5660) 6159.75,5642.18 C30.2@6159.75,5600.71
$1N20778: R4.1 U1.12 | length 1117.8
  Top Layer w10: R4.1@6376.93,6914.66 6376.93,6960 6421.93,7005 6841.93,7005 6906.93,6940 6906.93,6775 7026.93,6655 7146.93,6655 7158.66,6666.73 U1.12@7158.66,6692.32
$1N20823: R5.1 U1.14 | length 915.9
  Top Layer w10: R5.1@6476.93,6914.66 6476.93,6950 6506.93,6980 6816.93,6980 6871.93,6925 6871.93,6765 7023.35,6613.58 U1.14@7099.61,6613.58
$1N20868: R7.2 U1.30 | length 1501
  Top Layer w10: R7.2@6576.93,6914.66 6576.93,6935 6596.93,6955 6791.93,6955 6836.93,6910 6836.93,6755 7001.93,6590 7001.93,6200 7036.93,6165 7176.93,6165 7257.09,6245.16 U1.30@7257.09,6357.68
$1N22304: R19.2 R21.2 U4.7 | length 326.9
  Top Layer w10: U4.7@6991.93,4317.73 6991.93,4255 7041.93,4205 7169.1,4205 R21.2@7169.44,4204.66 R19.2@7235.27,4204.66
$1N22515: C28.2 U6.10 X2.1 | length 392
  Top Layer w10: U6.10@6058.91,4749.06 6058.91,4490.47 C28.2@6084.37,4465 6094.37,4455 6094.37,4382.76 X2.1@6102.13,4375.01
$1N22520: C29.2 U6.9 X2.2 | length 392
  Top Layer w10: X2.2@6001.74,4375.01 6017.47,4390.74 6017.47,4461.81 C29.2@6014.49,4464.79 6039.22,4489.51 U6.9@6039.22,4749.06
$1N22598: C2.2 U6.29 X1.3 | length 562.3
  Top Layer w10: U6.29@6432.92,4749.06 6432.92,4464.02 6474.49,4422.44 C2.2@6474.49,4392.3 6511.93,4354.86 6511.93,4275 6482.48,4245.55 X1.3@6468.62,4245.55
$1N22637: C1.2 U6.30 X1.1 | length 562.7
  Top Layer w10: U6.30@6452.61,4749.06 6452.61,4614.54 ccw(c6462.27,4614.54) 6462.27,4604.88 cw(c6462.27,4595.22) 6471.93,4595.22 6471.93,4584.54 cw(c6462.27,4584.54) 6462.27,4574.88 ccw(c6462.27,4565.22) 6452.61,4565.22 6452.61,4554.54 ccw(c6462.27,4554.54) 6462.27,4544.88 cw(c6462.27,4535.22) 6471.93,4535.22 6471.93,4524.54 cw(c6462.27,4524.54) 6462.27,4514.88 ccw(c6462.27,4505.22) 6452.61,4505.22 6452.61,4489.28 6458,4483.88 ccw(c6461.54,4487.42) 6465.07,4483.88 cw(c6468.61,4480.35) 6472.14,4483.88 6486.29,4469.74 cw(c6482.75,4466.2) 6486.29,4462.67 ccw(c6489.82,4459.13) 6486.29,4455.6 ccw(c6496.89,4466.2) 6507.5,4455.6 cw(c6516.4,4443.29) 6528.71,4434.38 ccw(c6539.32,4423.78) 6528.71,4413.17 C1.2@6549.37,4392.51 6549.37,4320.32 X1.1@6555.24,4314.45
$1N22837: C4.2 D1.3 U6.6 | length 428.5
  Top Layer w12: C4.2@5839.49,4517.56 C4.2@5839.49,4510 5891.93,4510 5980.17,4598.23 U6.6@5980.17,4749.06
  Top Layer w20: D1.3@5811.63,4428.62 5811.63,4444.69 5839.49,4472.56 C4.2@5839.49,4510
$1N30181: LED1.2 R12.2 | length 211.4
  Top Layer w10: LED1.2@5426.8,4195.77 5551.93,4320.9 R12.2@5551.93,4355.34
$1N30183: LED2.2 R13.2 | length 186.6
  Top Layer w10: LED2.2@5551.8,4195.77 5616.93,4260.9 R13.2@5616.93,4355.34
$1N30798: H5.1 LED1.1 | length 305.2
  Top Layer w10: LED1.1@5427.07,4132.82 5371.93,4077.68 5371.93,3940 5406.93,3905 H5.1@5446.93,3905
$1N30802: H5.3 LED2.1 | length 271.4
  Top Layer w10: H5.3@5546.93,3905 5546.93,3920 5496.93,3970 5496.93,4077.68 LED2.1@5552.07,4132.82
$1N40888: H5.7 WK_UP.2 | length 739.3
  Top Layer w15: WK_UP.2@5210.36,3915 5210.36,3816.57 5231.93,3795 5721.93,3795 5746.93,3820 H5.7@5746.93,3905
$1N41106: H5.5 KEY.1 R15.1 | length 1074.6
  Top Layer w15: R15.1@5121.59,4435 5210.36,4346.23 KEY.1@5210.36,4260 5316.93,4153.43 5316.93,3855 5346.93,3825 5631.93,3825 5646.93,3840 H5.5@5646.93,3905
$1N48802: H1.2 R3.2 | length 95.3
  Top Layer w10: H1.2@6276.93,6760 R3.2@6276.93,6855.34
$1N48806: H1.4 R4.2 | length 95.3
  Top Layer w10: H1.4@6376.93,6760 R4.2@6376.93,6855.34
$1N48810: H1.6 R5.2 | length 95.3
  Top Layer w10: H1.6@6476.93,6760 R5.2@6476.93,6855.34
$1N49003: H1.8 R7.1 | length 95.3
  Top Layer w10: H1.8@6576.93,6760 R7.1@6576.93,6855.34
$1N49014: R6.2 U1.31 | length 1378.9
  Top Layer w10: R6.2@6676.93,6914.66 6677.27,6915 6741.93,6915 6801.93,6855 6801.93,6745 6971.93,6575 6971.93,6190 7021.93,6140 7191.93,6140 7276.77,6224.84 U1.31@7276.77,6357.68
$1N49019: H1.10 R6.1 | length 95.3
  Top Layer w10: H1.10@6676.93,6760 R6.1@6676.93,6855.34
$1N65423: C3.2 C6.2 L1.1 U6.38 U6.39 | length 1383.6
  Top Layer w10: v1(6486.93,5020) 6610.09,4896.85 U6.38@6610.09,4749.06 ; v1(6501.93,5055) 6629.77,4927.17 U6.39@6629.77,4749.06
  Bottom Layer w10: C6.2@6265.5,5103.76 6403.18,5103.76 v1(6486.93,5020) ; C3.2@6265.5,5178.21 6378.72,5178.21 v1(6501.93,5055)
  Bottom Layer w20: C3.2@6259.09,5184.61 C3.2@6265.5,5178.21 ; L1.1@6259.09,5250 6259.09,5237.84 6266.93,5230 6266.93,5179.64 C3.2@6265.5,5178.21 ; C6.2@6265.5,5103.76 C3.2@6265.5,5178.21
$1N75908: PWR.2 R11.1 | length 63.8
  Top Layer w10: R11.1@7005.45,6925.34 7005.45,6861.69 PWR.2@7005.53,6861.61
+3.3V: BOOT.1 BOOT.2 C7.2 C8.2 C9.2 C10.2 C11.2 C12.2 C13.2 C14.2 C15.2 C16.2 C17.2 C18.2 C20.2 C21.2 C22.2 C23.2 C24.2 C25.2 C26.2 C31.2 C32.1 C36.2 C37.2 C38.2 C39.2 C40.2 C41.2 C42.2 C43.2 C44.2 D1.1 H2.2 H2.4 H2.6 H2.8 JLINK.4 L1.2 LCD1.24 LCD1.25 R1.2 R2.2 R8.2 R11.2 R12.1 R13.1 R15.2 R18.1 R19.1 R20.1 U1.1 U1.9 U1.24 U1.36 U1.48 U2.2 U2.4 U3.1 U3.3 U3.9 U3.14 U3.27 U3.43 U3.49 U4.8 U6.15 U6.23 U6.36 U6.49 U6.62 U6.72 U6.82 U6.91 U6.103 U6.114 U6.127 U6.136 U6.149 U6.159 U6.171 U6.172 WK_UP.1 | length 10800
  Top Layer w12: U6.172@5810.88,4898.66 v1@5888.28,4898.66 ; U6.171@5810.88,4918.35 5868.59,4918.35 v1@5888.28,4898.66 ; U6.159@5810.88,5154.57 5886.5,5154.57 v1(5896.93,5165) ; U6.149@5810.88,5351.42 5870.52,5351.42 v1(5881.93,5340) ; U6.136@5810.88,5607.32 5869.62,5607.32 v1(5886.93,5590) ; v1(5891.93,4895) v1@5888.28,4898.66 ; v1(5976.93,5670) 5980.17,5673.23 U6.127@5980.17,5737.24 ; v1(6156.93,4825) 6157.33,4824.61 U6.15@6157.33,4749.06 ; v1(6216.93,5660) 6236.07,5679.13 U6.114@6236.07,5737.24 ; U6.23@6314.81,4749.06 6314.81,4822.87 v1(6316.93,4825) ; U6.103@6452.61,5737.24 6452.61,5674.33 v1(6461.93,5665) ; U6.36@6570.72,4749.06 6570.72,4823.78 v1(6571.93,4825) ; v1(6686.93,5675) 6688.83,5676.89 U6.91@6688.83,5737.24 ; v1(6691.93,5115) 6731.5,5154.57 U6.62@6799.06,5154.57 ; v1(6711.93,5560) 6723.67,5548.27 U6.82@6799.06,5548.27 ; v1(6721.93,5350) 6723.35,5351.42 U6.72@6799.06,5351.42 ; v1(6726.93,4895) 6730.59,4898.66 U6.49@6799.06,4898.66 ; C18.2@7071.15,6347.56 7046.93,6371.78 7046.93,6400 7063.66,6416.73 U1.24@7099.61,6416.73 ; U1.9@7217.72,6692.32 7217.72,6740.79 7256.93,6780 C17.2@7256.93,6802.44 ; U1.36@7375.2,6357.68 7375.2,6321.73 7396.93,6300 C16.2@7429.37,6300 ; U1.1@7375.2,6692.32 7375.2,6733.27 7386.93,6745 7481.77,6745 v2(7504.4,6767.64) ; U1.48@7434.25,6633.27 7507.64,6633.27 C15.2@7509.37,6635
  Top Layer w20: WK_UP.1@5013.51,3915 5106.93,4008.43 5106.93,4350 5061.93,4395 5061.93,4434.66 R15.2@5062.27,4435 ; v2(5331.93,4490) 5476.59,4490 R12.1@5551.93,4414.66 R13.1@5616.93,4414.66 ; v2(5636.93,4090) 5774.23,4227.3 D1.1@5774.23,4331.38 ; R8.2@6116.93,4017.53 6116.93,3950 v2(6161.93,3905) ; v2(6856.93,4365) 6856.93,4288.4 C37.2@6872.77,4272.56 6924.49,4272.56 6941.93,4290 U4.8@6941.93,4317.73 ; R11.2@7005.45,6984.66 7005.11,6985 7121.38,6985 R1.2@7121.72,6984.66 7126.38,6980 v2(7191.93,6980) ; C18.2@7071.15,6347.56 7089.37,6347.56 7141.93,6295 v2(7141.93,6285) ; v2(7191.93,6815) 7204.49,6802.44 C17.2@7256.93,6802.44 ; R19.1@7235.27,4145.34 R18.1@7301.1,4145.34 R20.1@7366.93,4145.34 7386.93,4125.34 v2(7386.93,4070) ; v2(7271.93,5770) 7271.93,5720 7291.93,5700 7291.93,5672.44 C38.2@7289.49,5670 7321.93,5670 7341.93,5650 7384.25,5650 U3.1@7384.8,5649.45 ; v2(7276.93,4930) 7276.93,4832.99 C43.2@7274.49,4830.55 U3.27@7384.8,4830.55 ; U3.14@7384.8,5240 v1(7440.24,5240) ; U3.9@7384.8,5397.48 7439.45,5397.48 v1(7441.93,5395) ; U3.3@7384.8,5586.46 7433.39,5586.46 v1(7436.93,5590) ; R2.2@7421.93,6859.97 7486.97,6859.97 7506.93,6840 7506.93,6770.17 v2(7504.4,6767.64) 7504.4,6639.97 C15.2@7509.37,6635 ; v2(7426.93,6240) 7426.93,6297.56 C16.2@7429.37,6300 ; U3.43@7829.06,5302.99 7952.36,5302.99 C39.2@7964.37,5315 7966.93,5317.56 v2(7966.93,5395) 7964.37,5397.56 C44.2@7964.37,5485 7957.4,5491.97 U3.49@7829.06,5491.97 ; LCD1.24@8456.16,4935 8509.49,4935 C36.2@8566.93,4877.56 ; v2(8566.93,4985) C36.2@8566.93,4877.56 ; C36.2@8571.93,4872.56 C36.2@8566.93,4877.56 ; 8484.37,6315 C31.2@8461.93,6337.44 8559.37,6337.44 8581.93,6360 8616.93,6360 v2(8621.93,6365) ; 8484.37,6315 8534.37,6265 v2(8621.93,6265) ; 8484.37,6315 v2(8621.93,6315) ; v2(8621.93,6265) v2(8668.85,6265) v2(8668.85,6315) ; v2(8621.93,6265) v2(8621.93,6315) ; v2(8621.93,6315) v2(8668.85,6315) ; v2(8621.93,6315) v2(8621.93,6365) ; v2(8621.93,6365) v2(8668.85,6365) v2(8668.85,6315)
  Top Layer w40: U2.2@7871.93,6416.61 U2.4@7871.93,6193.39 8165.44,6193.39 C32.1@8206.93,6234.88 8306.81,6234.88 8409.37,6337.44 C31.2@8461.93,6337.44
  Bottom Layer w12: C23.2@6647.53,5547.01 6695.6,5547.01 6708.59,5560 v1(6711.93,5560)
  Bottom Layer w20: v1(5881.93,5340) 5932.41,5340 C8.2@5942.41,5330 5942.41,5299.53 5971.93,5270 v2(6076.93,5270) ; v1(5886.93,5590) 5931.93,5545 C7.2@5942.41,5545 ; v1(5891.93,4895) 5937.41,4895 C11.2@5942.41,4890 5942.41,4918.28 5941.93,4918.76 v2(5941.93,5020) 5941.93,5142.34 5942.41,5142.81 C9.2@5942.41,5160 5937.41,5165 v1(5896.93,5165) ; v2(5966.93,5430) 5942.41,5454.53 C7.2@5942.41,5545 ; v1(5976.93,5670) 5942.41,5635.47 C26.2@5942.41,5615 C7.2@5942.41,5545 ; v1(6156.93,4825) 6154.97,4826.97 C12.2@6154.97,4879.19 6236.02,4879.19 v2(6236.42,4878.79) 6237.2,4878.01 C13.2@6309.23,4878.01 6316.93,4870.31 v1(6316.93,4825) ; L1.2@6216.17,5250 6216.93,5250.76 v2(6216.93,5315) ; v1(6216.93,5660) 6216.93,5614.77 C25.2@6229.97,5601.73 6280.2,5601.73 v2(6301.93,5580) ; v1(6461.93,5665) 6436.93,5640 C24.2@6436.93,5609.15 6437.78,5610 6491.93,5610 6511.93,5590 v2(6511.93,5535) 6511.93,5515 6531.93,5495 6631.93,5495 6651.93,5515 6651.93,5542.6 C23.2@6647.53,5547.01 C10.2@6647.53,5635 6686.93,5674.41 v1(6686.93,5675) ; C14.2@6479.97,4879.19 6485.78,4885 v2(6551.93,4885) ; v2(6531.93,5290) v2@6541.93,5290 ; v1(6571.93,4825) 6551.93,4845 v2(6551.93,4885) ; v1(6691.93,5115) 6689.37,5115 C21.2@6634.49,5169.88 6634.49,5197.44 v2@6541.93,5290 ; v1(6721.93,5350) 6720.83,5351.1 C22.2@6647.53,5351.1 6646.93,5350.51 6646.93,5320 6616.93,5290 v2@6541.93,5290 ; v1(6726.93,4895) 6711.12,4879.19 C20.2@6666.93,4879.19 6661.12,4885 v2(6551.93,4885) ; v1(7436.93,5590) C40.2@7579.37,5590 ; v1(7440.24,5240) 7489.37,5240 C42.2@7504.37,5225 7504.37,5167.56 v2(7516.93,5155) ; v1(7441.93,5395) 7494.37,5395 C41.2@7504.37,5385 7504.37,5407.44 7536.93,5440 v2(7601.93,5440) ; v2(7576.93,5655) 7576.93,5592.44 C40.2@7579.37,5590 ; C40.2@7584.37,5585 C40.2@7579.37,5590
+5V: C33.2 C34.1 C35.2 H3.2 H3.4 H3.6 H3.8 LCD1.28 LCD2.1 LCD2.2 POWER.3 POWER.4 U2.3 | length 1518.2
  Top Layer w12: LCD2.1@5293.11,5246.14 5320.79,5246.14 5342.01,5224.92 C34.1@5374.37,5224.92 5333.47,5265.83 LCD2.2@5293.11,5265.83
  Top Layer w20: v2(5311.93,5180) 5329.45,5180 C34.1@5374.37,5224.92 ; LCD1.28@8456.16,4735 C35.2@8569.37,4735 ; C35.2@8571.93,4737.56 C35.2@8569.37,4735 ; v3(8641.93,4375) 8641.93,4700 8606.93,4735 C35.2@8569.37,4735
  Top Layer w40: POWER.3@7773.51,6893.11 7736.62,6930 7691.93,6930 7650.08,6888.15 C33.2@7650.08,6570 7650.08,6516.85 v6(7686.93,6480) 7751.93,6480 7781.38,6450.56 U2.3@7781.38,6416.61
+5V_IN: D2.5 POWER.2 POWER.5 USB.A4 USB.A9 USB.B4 USB.B9 | length 2315.7
  Top Layer w12: POWER.2@7871.93,6865.01 7916.93,6820 8006.93,6820 8041.93,6855 8216.93,6855 8266.93,6805 8266.93,6773.03 8278.93,6761.03 D2.5@8307.17,6761.03 ; USB.B4@8521.86,6741.56 USB.A9@8521.86,6753.38
  Top Layer w20: POWER.2@7871.93,6865.01 POWER.2@7871.93,6893.11
  Top Layer w23: POWER.5@7871.93,6656.89 7875.04,6656.89 7973.61,6558.32 USB.A4@8522.72,6558.32
  Top Layer w24: POWER.2@7871.93,6893.11 7871.93,6919.99 7932.47,6980.53 8321.4,6980.53 8431.93,6870 8431.93,6780.77 8465.23,6747.48 USB.A9@8521.15,6747.48
  Top Layer w40: POWER.5@7871.93,6656.89 POWER.2@7871.93,6865.01
BOOT0: R9.2 U6.166 | length 4054.1
  Top Layer w10: v1(5736.93,5020) 5740.17,5016.77 U6.166@5810.88,5016.77 ; v1(5806.93,3780) 5776.93,3750 5776.93,3565 5811.93,3530 7386.93,3530 7423.76,3566.83 7423.76,3726.83 7621.93,3925 R9.2@7884.9,3925
  Bottom Layer w10: v1(5736.93,5020) 5721.93,5005 5696.93,5005 5681.93,4990 5681.93,4185 5766.93,4100 5796.93,4100 5836.93,4060 5836.93,3810 v1(5806.93,3780)
BOOT1: R10.1 U6.58 | length 1563.7
  Top Layer w10: U6.58@6799.06,5075.83 6881.11,5075.83 7051.93,4905 7051.93,4645 7111.93,4585 7361.93,4585 7656.93,4290 R10.1@7884.9,4290
D_N: D2.4 USB.A7 USB.B7 | length 422.6
  Top Layer w10: D2.4@8307.17,6723.63 8313.3,6723.63 8413.48,6623.45 USB.B7@8521.85,6623.45 8579.57,6623.45 8591.93,6635.81 8591.93,6652.82 8581.93,6662.82 USB.A7@8521.85,6662.82
D_P: D2.6 USB.A6 USB.B6 | length 422.7
  Top Layer w10: D2.6@8307.17,6798.43 8333.28,6798.43 8361.93,6769.77 8361.93,6725 8404.42,6682.51 ; USB.A6@8521.85,6643.14 8443.79,6643.14 8404.42,6682.51 ; USB.B6@8521.85,6682.51 8404.42,6682.51
DO_N: D2.3 U1.32 | length 1783.8
  Top Layer w10: U1.32@7296.46,6357.68 7296.46,6195.47 v1(7311.93,6180) ; v1(8121.93,6750) 8164.22,6750 8190.59,6723.63 D2.3@8216.69,6723.63
  Bottom Layer w10: v1(7311.93,6180) 7336.93,6155 8096.93,6155 8182.93,6241 8182.93,6524 8084.4,6622.54 8084.4,6732.46 8101.93,6750 v1(8121.93,6750)
DO_P: D2.1 U1.33 | length 1783.3
  Top Layer w10: U1.33@7316.14,6357.68 7316.14,6225.79 v1(7341.93,6200) ; v1(8116.93,6780) 8166.93,6780 8185.36,6798.43 D2.1@8216.69,6798.43
  Bottom Layer w10: v1(7341.93,6200) 7366.07,6175.86 8092.8,6175.86 8166.93,6250 8166.93,6517.37 ; v1(8116.93,6780) 8086.93,6780 8040.36,6733.42 8040.36,6711.58 8068.4,6683.54 8068.4,6598.54 8096.93,6570 8114.29,6570 8166.92,6517.37
GND: B1.2 BOOT.5 BOOT.6 C1.1 C2.1 C3.1 C4.1 C5.1 C6.1 C7.1 C8.1 C9.1 C10.1 C11.1 C12.1 C13.1 C14.1 C15.1 C16.1 C17.1 C18.1 C19.1 C20.1 C21.1 C22.1 C23.1 C24.1 C25.1 C26.1 C27.1 C28.1 C29.1 C30.1 C31.1 C32.2 C33.1 C34.2 C35.1 C36.1 C37.1 C38.1 C39.1 C40.1 C41.1 C42.1 C43.1 C44.1 D2.2 H2.1 H2.3 H2.5 H2.7 H3.1 H3.3 H3.5 H3.7 JLINK.1 KEY.2 LCD1.22 LCD1.26 LCD1.27 LCD2.3 LCD2.4 LCD2.5 LCD2.11 LCD2.12 LCD2.13 LCD2.20 LCD2.21 LCD2.22 LCD2.23 LCD2.29 LCD2.41 LCD2.42 PWR.1 R14.2 R16.1 R17.2 R21.1 RESET.2 U1.8 U1.23 U1.35 U1.44 U1.47 U2.1 U3.6 U3.12 U3.28 U3.41 U3.46 U3.52 U3.54 U4.1 U4.2 U4.3 U4.4 U6.14 U6.22 U6.37 U6.48 U6.61 U6.71 U6.90 U6.102 U6.113 U6.126 U6.135 U6.148 U6.158 USB.1 USB.2 USB.3 USB.4 USB.A1 USB.A12 USB.B1 USB.B12 X1.2 X1.4 | length 12250.9
  Top Layer w12: v4(5201.93,5810) 5214.61,5797.32 LCD2.29@5293.11,5797.32 ; LCD2.3@5293.11,5285.51 5337.44,5285.51 v2(5356.93,5305) v2@5356.73,5305.2 ; LCD2.4@5293.11,5305.2 v2@5356.73,5305.2 ; LCD2.5@5293.11,5324.88 5337.05,5324.88 v2@5356.73,5305.2 ; LCD2.11@5293.11,5442.99 5334.92,5442.99 v2(5351.93,5460) 5349.25,5462.68 v2@5344.25,5462.68 ; LCD2.12@5293.11,5462.68 v2@5344.25,5462.68 ; LCD2.13@5293.11,5482.36 5324.57,5482.36 v2@5344.25,5462.68 ; LCD2.20@5293.11,5620.16 5327.09,5620.16 v5@5346.77,5639.84 ; LCD2.21@5293.11,5639.84 v5@5346.77,5639.84 ; LCD2.22@5293.11,5659.53 5327.4,5659.53 v5(5346.93,5640) ; LCD2.23@5293.11,5679.21 5332.72,5679.21 5346.93,5665 v5(5346.93,5640) ; U6.158@5810.88,5174.25 5856.18,5174.25 v1(5886.93,5205) ; U6.148@5810.88,5371.1 5858.03,5371.1 5881.93,5395 6006.93,5395 6026.93,5415 v2(6026.93,5430) ; U6.135@5810.88,5627.01 5883.94,5627.01 v1(5891.93,5635) ; U6.126@5999.85,5737.24 5999.85,5687.09 6051.93,5635 v1(6051.93,5580) ; v1(6106.93,4835) 6106.93,4827.41 6137.65,4796.69 U6.14@6137.65,4749.06 ; U6.113@6255.76,5737.24 6255.76,5661.18 6281.93,5635 v1(6306.93,5635) ; v1(6276.93,4820) 6295.13,4801.81 U6.22@6295.13,4749.06 ; U6.102@6472.29,5737.24 6472.29,5694.65 6506.93,5660 v2(6526.93,5660) ; U6.37@6590.4,4749.06 6590.4,4706.54 v1(6606.93,4690) ; U6.90@6708.51,5737.24 6708.51,5693.43 6720.69,5681.25 v1(6720.69,5660) ; v1(6711.93,5085) 6726.93,5100 6726.93,5110 6751.81,5134.88 U6.61@6799.06,5134.88 ; v1(6721.93,4845) 6755.91,4878.98 U6.48@6799.06,4878.98 ; v1(6721.93,5310) 6743.66,5331.73 U6.71@6799.06,5331.73 ; U1.23@7099.61,6436.42 7170.51,6436.42 v2(7176.93,6430) ; v2(7236.93,6620) 7237.4,6620.47 U1.8@7237.4,6692.32 ; U1.35@7355.51,6357.68 7355.51,6433.58 v2(7371.93,6450) ; U1.44@7434.25,6554.53 7374.22,6554.53 7361.93,6566.82 7361.93,6603.58 7371.93,6613.58 U1.47@7434.25,6613.58 ; v5@5346.77,5639.84 v5(5346.93,5640)
  Top Layer w14: D2.2@8216.69,6761.03 8240.9,6761.03 8261.93,6740 8261.93,6635.85 R14.2@8241.08,6615
  Top Layer w20: v2(5185.3,5991.72) 5190.75,5997.18 LCD2.41@5190.75,6080.79 ; LCD2.42@5190.75,5179.21 5211.93,5158.03 5211.93,5075 v2(5226.93,5060) ; v2(5356.93,5305) 5429.49,5232.44 C34.2@5429.49,5224.92 ; v2(5606.93,4510) C4.1@5784.37,4510 ; v1(5956.93,4360) v1(5956.93,4420) ; v1(5956.93,4360) 5956.93,4328.04 5967.71,4317.27 v1(6017.5,4317.27) v1(6090.72,4317.27) 6135.91,4317.27 6146.93,4328.29 v1(6146.93,4360) v1(6146.93,4420) 6146.93,4467.53 C28.1@6146.6,4467.86 ; v1(5956.93,4420) 5956.93,4462.35 C29.1@5959.37,4464.79 5959.37,4487.44 5981.93,4510 v1(6006.93,4510) ; C19.1@6035.2,4017.44 6035.2,3946.73 v2(6076.93,3905) ; v1(6091.93,4510) 6121.93,4510 6139.49,4492.44 C28.1@6139.49,4465 ; C2.1@6419.37,4392.3 6419.37,4363.7 X1.2@6468.62,4314.45 ; X1.2@6448.62,4309.45 6443.62,4314.45 6441.38,4314.45 6411.93,4285 v1(6411.93,4265.84) 6411.93,4215.56 6430.54,4196.95 v1(6472.68,4196.95) 6513.05,4196.95 6561.65,4245.55 6589.93,4245.55 6616.93,4272.55 v1(6616.93,4295.46) v1(6616.93,4339.08) 6616.93,4380.07 C1.1@6609.49,4387.51 ; v2(6866.93,4150) 6866.93,4211.6 C37.1@6872.77,4217.44 ; U4.1@6941.93,4099.43 6941.93,4160 6951.93,4170 6993.93,4170 ; U4.2@6991.93,4099.43 6991.93,4168 6993.93,4170 ; PWR.1@7004.47,6800 PWR.1@7005.8,6798.66 7055.6,6798.66 v2(7056.93,6800) ; U4.3@7041.93,4099.43 7041.93,4169.11 7042.82,4170 ; C18.1@7071.15,6292.44 7071.15,6215.78 v2(7071.93,6215) ; U4.4@7091.93,4099.43 7091.93,4160 7081.93,4170 ; v2(7166.93,4070) 7169.1,4072.17 R21.1@7169.1,4145 ; R21.1@7169.44,4145.34 R21.1@7169.1,4145 ; v2(7191.93,6910) 7191.93,6890 7226.93,6855 7254.37,6855 C17.1@7256.93,6857.56 C5.1@7340.6,6857.56 ; v2(7201.93,4930) 7201.93,4847.99 C43.1@7219.37,4830.55 ; v2(7226.93,5725) 7226.93,5677.44 C38.1@7234.37,5670 ; U3.12@7384.8,5302.99 v1(7440.24,5302.99) ; U3.6@7384.8,5491.97 v1(7440.24,5491.97) ; C16.1@7484.49,6300 7511.93,6272.56 v2(7511.93,6240) ; v2(7537.24,6559.96) 7564.49,6587.22 C15.1@7564.49,6635 ; v1(7773.63,4830.55) U3.28@7829.06,4830.55 ; v1(7773.63,5240) U3.41@7829.06,5240 ; U3.46@7829.06,5397.48 v1(7884.5,5397.48) ; U3.52@7829.06,5586.46 7945.47,5586.46 v2(7946.93,5585) ; U3.54@7829.06,5649.45 v1(7884.5,5649.45) ; C39.1@8019.49,5315 8041.93,5337.44 v2(8041.93,5395) 8041.93,5462.56 C44.1@8019.49,5485 ; v2(8073.01,6910) R16.1@8241.08,6910 ; v2(8166.93,6670) 8186.08,6670 R14.2@8241.08,6615 ; R17.2@8226.93,4801 8292.93,4735 LCD1.27@8356.16,4735 ; LCD1.26@8456.16,4835 8473.72,4817.44 C36.1@8571.93,4817.44 ; v2(8566.93,4600) 8571.93,4605 C35.1@8571.93,4682.44 ; 6993.93,4170 7042.82,4170 ; 7042.82,4170 7081.93,4170 ; 7081.93,4170 7121.93,4170 7146.93,4145 R21.1@7169.1,4145 ; v2(8046.93,6425) v2(8046.93,6475) v2(8100.28,6475) v2(8100.28,6425) v2(8046.93,6425)
  Top Layer w22: 8461.93,6449.13 8461.93,6507.1 8482.05,6527.22 USB.B12@8522.07,6527.22 ; USB.A12@8521.85,6784.87 8521.85,6797.47 USB.2@8547.45,6823.07 USB.4@8712.01,6823.06 ; USB.B12@8522.39,6527.54 USB.B12@8522.07,6527.22 ; USB.3@8712.01,6482.9 USB.1@8547.44,6482.9 8522.07,6508.27 USB.B12@8522.07,6527.22
  Top Layer w40: C33.1@7705.2,6570 7856.93,6570 7926.93,6500 8021.93,6500 v2(8046.93,6475) 7986.93,6475 7962.48,6450.55 U2.1@7962.48,6416.61 ; v2(8100.28,6475) 8177.05,6475 C32.2@8206.93,6445.12 8206.93,6465 8241.93,6500 8411.06,6500 8461.93,6449.13 C31.1@8461.93,6392.56
  Bottom Layer w20: C11.1@5997.53,4890 6001.93,4894.41 v2(6001.93,5020) 6001.93,5155.59 C9.1@5997.53,5160 ; C8.1@5997.53,5330 6106.93,5330 v2(6191.93,5415) ; C26.1@5997.53,5615 C7.1@5997.53,5545 6026.93,5515.59 v2(6026.93,5430) ; C12.1@6154.97,4934.31 6171.24,4934.31 v2(6236.93,5000) 6303.8,4933.13 C13.1@6309.23,4933.13 ; v2(6156.93,5090) 6196.62,5090 C6.1@6210.38,5103.76 C3.1@6210.38,5178.21 ; C30.1@6159.75,5545.59 6159.75,5447.18 v2(6191.93,5415) ; C25.1@6229.97,5546.61 6229.97,5453.03 v2(6191.93,5415) ; v2(6406.93,4905) 6422.94,4905 6452.25,4934.31 C14.1@6479.97,4934.31 C20.1@6666.93,4934.31 ; C24.1@6436.93,5554.03 6436.93,5440 v2(6486.93,5390) ; v2(6526.93,5660) 6567.41,5660 C10.1@6592.41,5635 C23.1@6592.41,5547.01 ; C21.1@6579.37,5169.88 6547.06,5169.88 v2(6471.93,5245) 6471.93,5375 v2(6486.93,5390) ; C22.1@6592.41,5351.1 6525.83,5351.1 v2(6486.93,5390) ; C27.1@6592.41,5428.15 6525.08,5428.15 v2(6486.93,5390) ; C42.1@7559.49,5225 7586.93,5197.56 v2(7586.93,5155) ; C41.1@7559.49,5385 v2(7651.93,5385) ; C40.1@7639.49,5585 v2(7946.93,5585) ; B1.2@7863.28,4325 8036.93,4325 v2(8081.93,4280)
  other v1: 5216.93,3360 5366.93,3360 5516.93,3360 5666.93,3360 5816.93,3360 5966.93,3360 6116.93,3360 6266.93,3360 6416.22,3452.28 6566.22,3452.28 6716.22,3452.28 6866.22,3452.28 7016.22,3452.28 7166.22,3452.28 7316.22,3452.28 7466.22,3452.28 7616.22,3452.28 7766.22,3452.28 7916.22,3452.28 8066.22,3452.28 8216.22,3452.28 8366.22,3452.28 8516.22,3452.28 7466.22,3602.28 7616.22,3602.28 7766.22,3602.28 8066.22,3602.28 8216.22,3602.28 8516.22,3602.28 8666.22,3602.28 6266.22,3752.28 7616.22,3752.28 8666.22,3752.28 6866.22,3902.28 8066.22,3902.28 8216.22,3902.28 8366.22,3902.28 8516.22,3902.28 8666.22,3902.28 5216.22,4052.28 6866.22,4052.28 7316.22,4052.28 8516.22,4052.28 8666.22,4052.28 6116.22,4202.28 6416.22,4202.28 6566.22,4202.28 7916.22,4202.28 8066.93,4202.28 8216.93,4202.28 8516.22,4202.28 8666.22,4202.28 6416.22,4352.28 7766.22,4352.28 8066.22,4352.28 8216.22,4352.28 8366.22,4352.28 8516.22,4352.28 5966.22,4502.28 7766.22,4502.28 7916.22,4502.28 8066.22,4502.28 8216.22,4502.28 8516.22,4502.28 7766.22,4652.28 7916.22,4652.28 8066.22,4652.28 8216.22,4652.28 7766.22,4802.28 8066.22,4802.28 8066.22,5102.28 8216.22,5102.28 8516.22,5102.28 5216.22,5252.28 8216.22,5252.28 8726.93,5285 6716.22,5402.28 7916.22,5402.28 8726.93,5425 8216.22,5552.28 8726.93,5575 8726.93,5725 8726.93,5875 8726.93,6025 5216.22,6152.28 8666.22,6152.28 6266.22,6302.28 6416.22,6302.28 6566.22,6302.28 6716.22,6302.28 7616.22,6302.28 7766.22,6302.28 8066.22,6302.28 6266.22,6452.28 6416.22,6452.28 6566.22,6452.28 6716.22,6452.28 8366.22,6452.28 4981.93,6520 5131.93,6520 5216.22,6602.28 5516.22,6602.28 5816.22,6602.28 6416.22,6602.28 6716.22,6602.28 7166.22,6602.28 8666.22,6602.28 4981.93,6683.86 7766.22,6752.28 8666.22,6752.28 4981.93,6850 5066.22,6902.28 5516.22,6902.28 7316.22,6902.28 8516.22,6902.28 8666.22,6902.28 5216.22,7052.28 7016.22,7052.28 7166.22,7052.28 7316.22,7052.28 7916.22,7052.28 8366.22,7052.28 8516.22,7052.28 5376.93,7130 5526.93,7130 5676.93,7130 5826.93,7130 5976.93,7130 6126.93,7130 6276.93,7130 6426.93,7130 6576.93,7130 6726.93,7130
  other v2: 7361.93,6583.67
NRST: C19.2 H1.1 LCD1.5 LCD2.40 R8.1 RESET.1 U6.31 | length 12143.1
  Top Layer w10: v1(5016.93,3765) 5741.93,3765 5986.93,4010 5986.93,4040 6019.49,4072.56 C19.2@6035.2,4072.56 ; U6.31@6472.29,4749.06 6472.29,4644.65 6506.93,4610 6506.93,4525 6586.93,4445 6636.93,4445 6656.93,4425 6656.93,4245 6585.36,4173.43 RESET.1@6585.36,4030
  Top Layer w12: v1(5261.93,6145) 5261.93,6025 5273.07,6013.86 LCD2.40@5293.11,6013.86
  Top Layer w20: C19.2@6035.2,4072.56 6112.64,4072.56 R8.1@6116.93,4076.85 6165.08,4076.85 6191.93,4050 v2(6191.93,4000)
  Bottom Layer w10: v1(5016.93,3765) 4936.46,3845.47 4936.46,6039.53 5261.93,6365 ; v1(5261.93,6145) 5261.93,6365 ; H1.1@6276.93,6660 6276.93,6605 6241.93,6570 6016.93,6570 5896.93,6450 5346.93,6450 5261.93,6365
  Bottom Layer w20: v2(6191.93,4000) 6251.93,3940 6511.93,3940 6585.36,4013.43 RESET.1@6585.36,4030 6736.93,4030 6821.93,3945 8156.93,3945 8531.93,4320 8671.93,4320 8716.93,4365 8716.93,5045 8671.93,5090 8671.93,6015 8516.93,6170 8166.93,6170 8126.93,6130 8126.93,5890 8181.93,5835 LCD1.5@8356.16,5835